# Altium PCB FEV-60_Motor_Driver.PcbDoc
Units mil, origin at the board's own origin, x right, y up, seen from the top; angles counter-clockwise.
Board outline 6850 x 5225 mil, 2 copper layers (Top Layer, Bottom Layer); 88 components, 67 nets, 333 pads, 63 vias.
Unrouted connection lines stored in the file: 85.
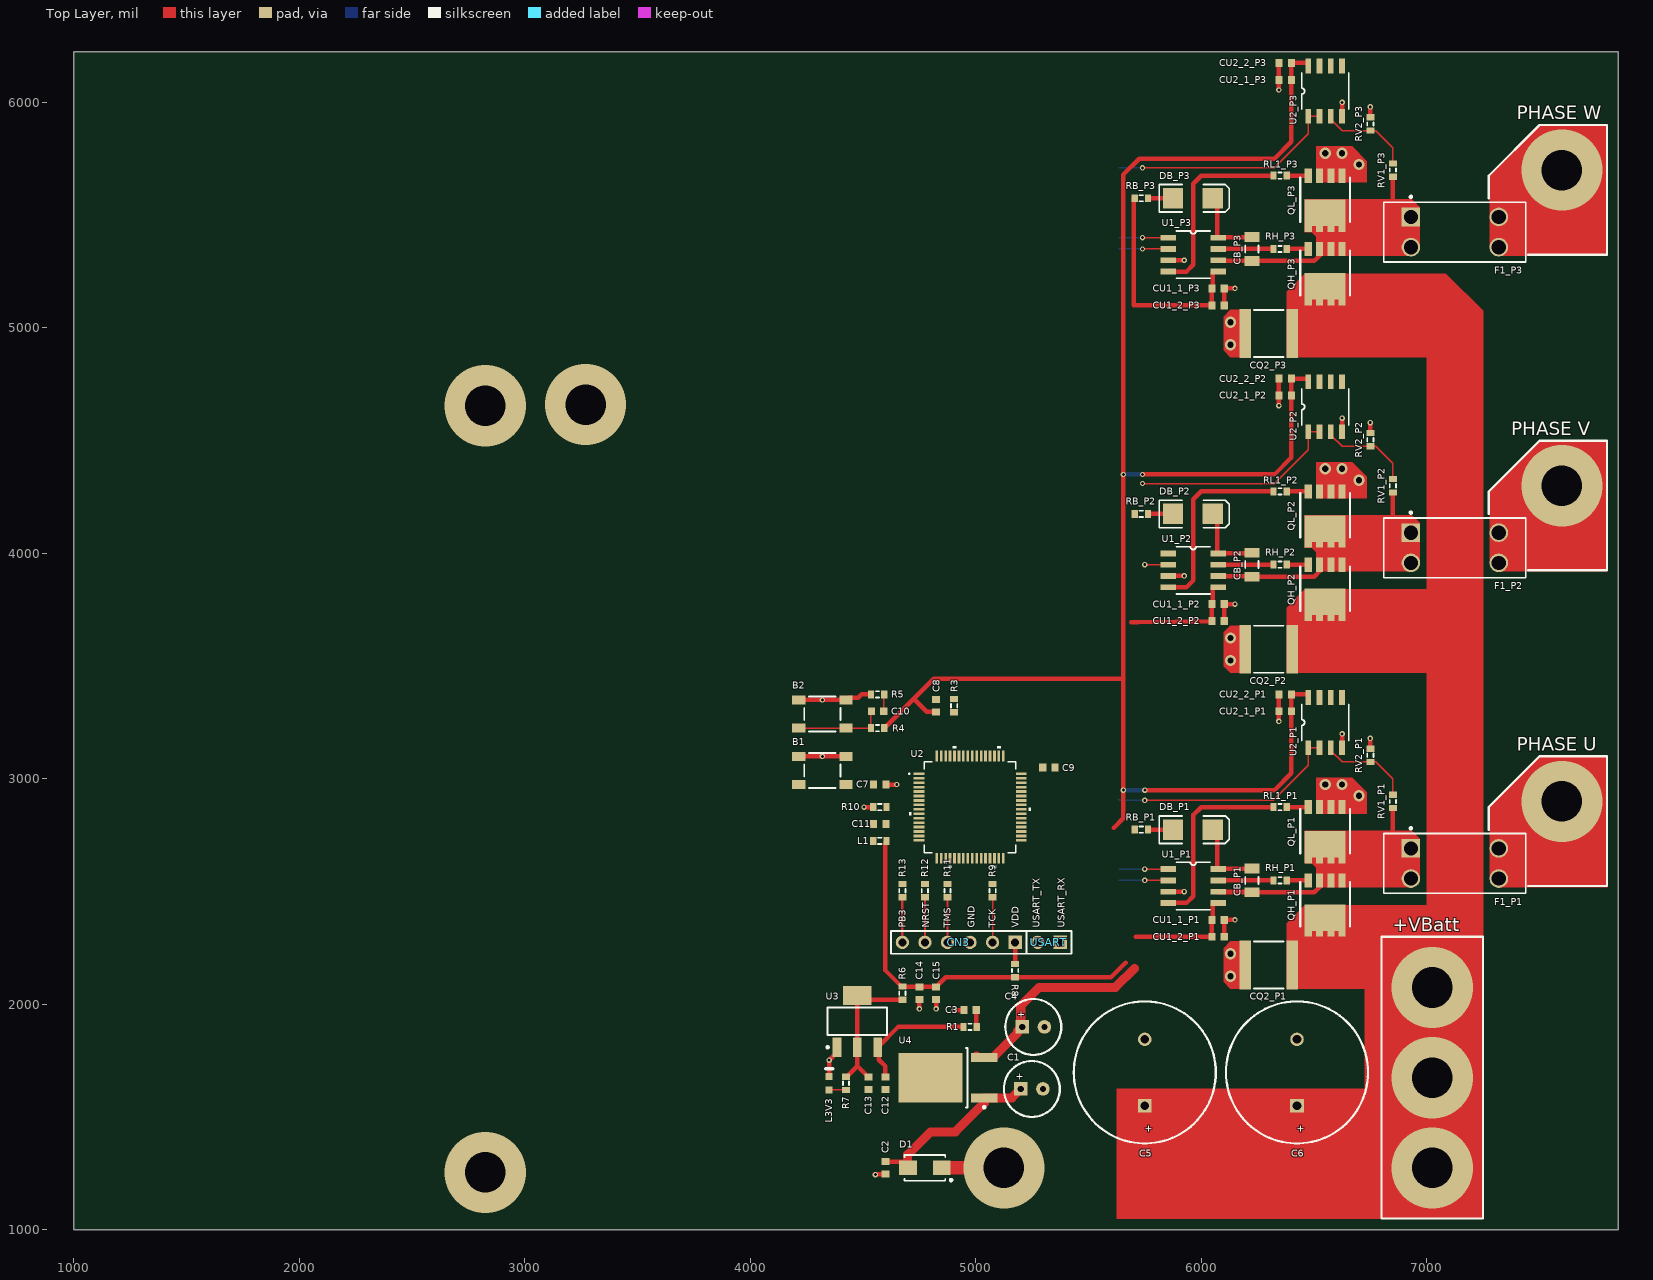
[diagram p0: Top Layer view]
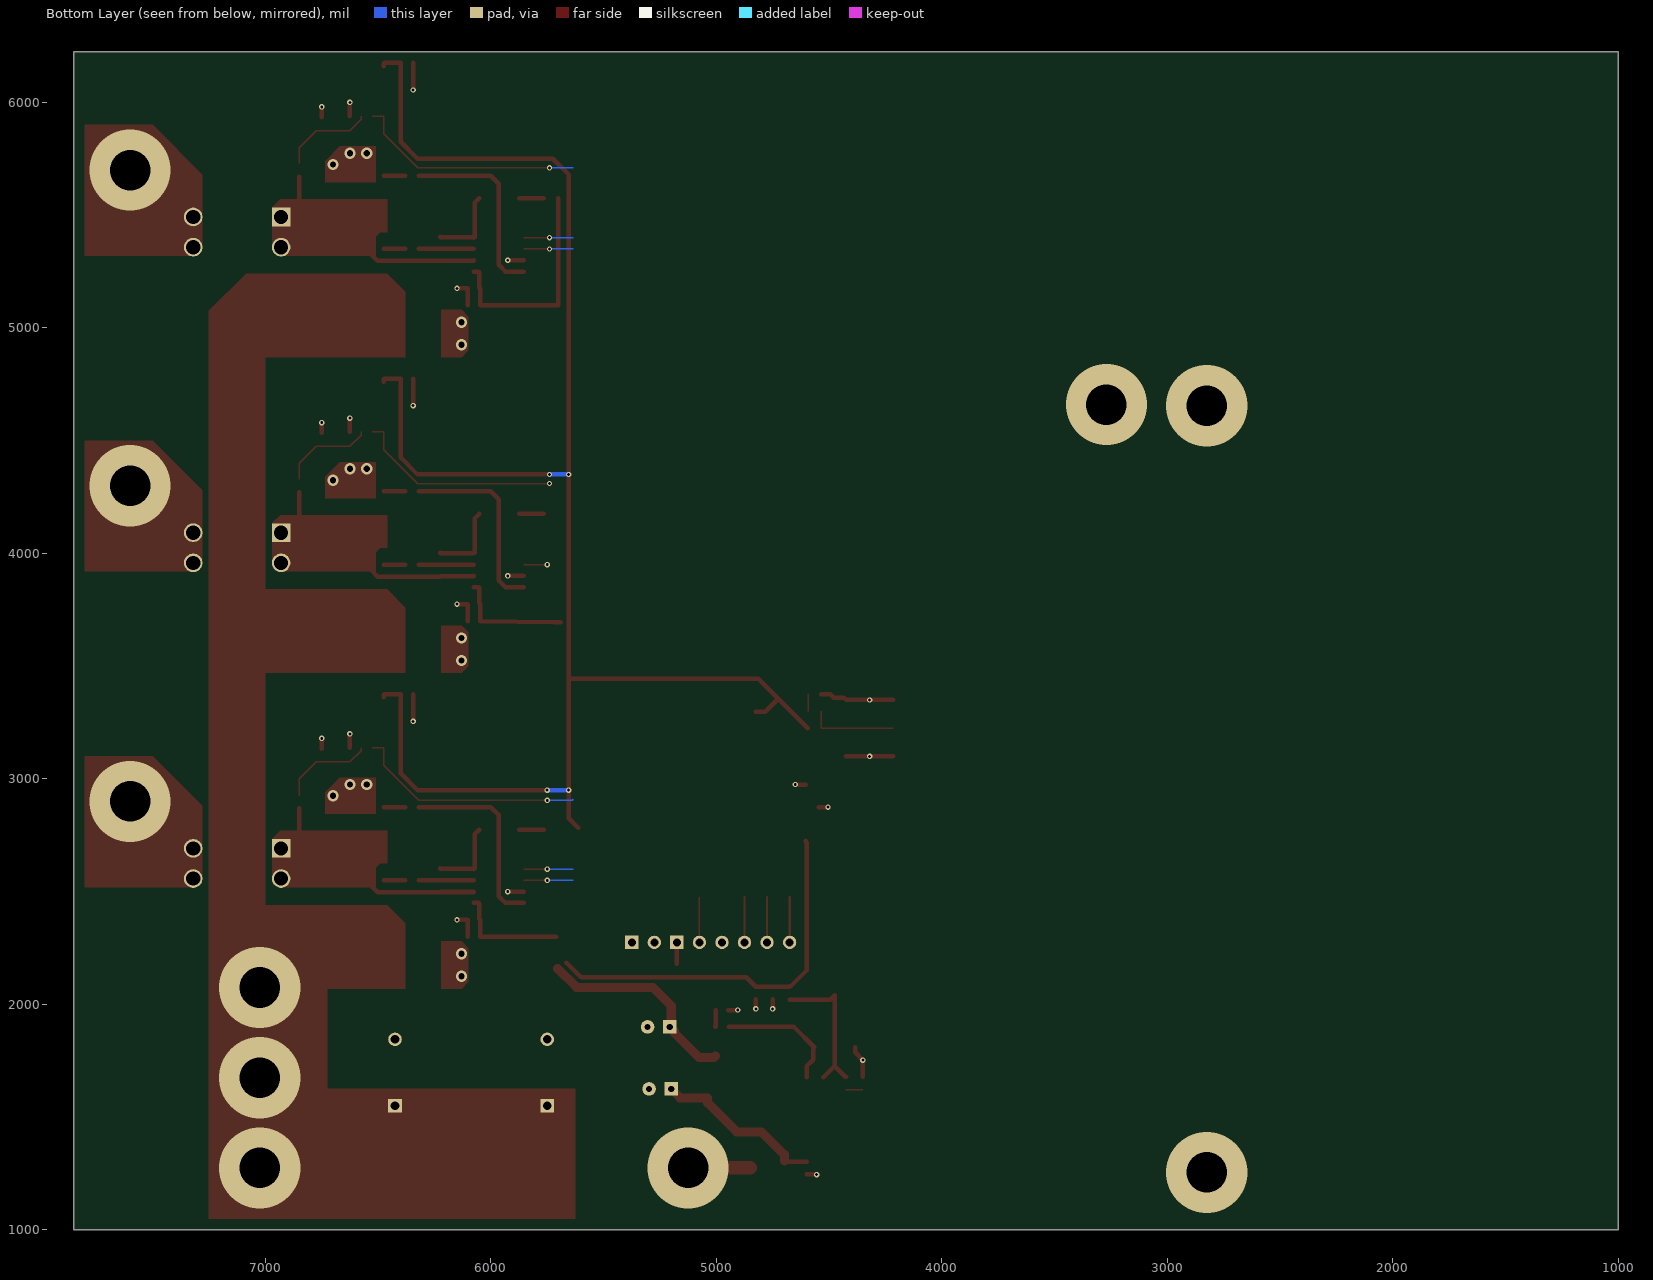
[diagram p1: Bottom Layer view, seen from below]

## Layer stack, top to bottom
Top Solder: solder mask 0.4, Solder Resist, Dk 3.5
Top Layer: signal copper 1.4
Dielectric 1: dielectric 12.6, FR-4, Dk 4.8
Bottom Layer: signal copper 1.4
Bottom Solder: solder mask 0.4, Solder Resist, Dk 3.5

## Board outline
1000,1000 7850,1000 7850,6225 1000,6225

## Design rules (kind name [scope] priority, off if disabled: settings)
Clearance Clearance_1 [InNamedPolygon('Bottom Layer-GND')] p1: gap=10 ignorepadtopadclearanceinfootprint=FALSE except(0: Arc-Hole Track-Hole SMDPad-Hole THPad-Hole Via-Hole Fill-Hole Poly-Hole Region-Hole Text-Hole; 20: Via-Fill Via-Poly Via-Region)
Clearance [All] p2: gap=10 ignorepadtopadclearanceinfootprint=FALSE except(0: Arc-Hole Track-Hole SMDPad-Hole THPad-Hole Via-Hole Fill-Hole Poly-Hole Region-Hole Text-Hole)
PlaneClearance [All] p1: clearance=100
PolygonConnect PolygonConnect_3 [All vs IsNamedPolygon('Bottom Layer-GND')] p1: connectstyle=Direct reliefconductorwidth=10 reliefentries=4 polygonreliefangle="90 Angle" airgapwidth=10
PolygonConnect PolygonConnect_2 [All vs IsNamedPolygon('Bottom Layer-GND')] p2: connectstyle=Relief reliefconductorwidth=25 reliefentries=4 polygonreliefangle="90 Angle" airgapwidth=10
PolygonConnect [All] p3: connectstyle=Relief reliefconductorwidth=10 reliefentries=4 polygonreliefangle="90 Angle" airgapwidth=10
RoutingVias [All] p1: holewidth=13 width=24 viastyle="Through Hole" minholewidth=13 minwidth=24 maxholewidth=28 maxwidth=50
SilkToSilkClearance [All] p1: silktosilkclearance=3
SilkToSolderMaskClearance [IsPad] p1: minsilkscreentomaskgap=5 clearancetoexposedcopper=TRUE
SolderMaskExpansion [All] p1: expansion=4
Width [All] p1: maxlimit=100 minlimit=6 preferedwidth=6
27 further rules are at their usual default settings.

## Classes and differential pairs
net class D1_Nets: 24V NetC1_1
net class C4_Nets: 12V GND
net class C3_Nets: 12V GND
net class C2_Nets: GND NetC1_1
net class C1_Nets: GND NetC1_1
net class U4_Nets: 12V GND NetC1_1
net class R1_Nets: 12V NetC12_2
net class L3V3_Nets: GND NetL3V3_1
net class RV2_P3_Nets: GND NetRV1_P3_1
net class RV2_P2_Nets: GND NetRV1_P2_1
net class RV2_P1_Nets: GND NetRV1_P1_1
net class RV1_P3_Nets: NetCB_P3_1 NetRV1_P3_1
net class RV1_P2_Nets: NetCB_P2_1 NetRV1_P2_1
net class RV1_P1_Nets: NetCB_P1_1 NetRV1_P1_1
net class RL1_P3_Nets: LO_P3 NetQL_P3_2
net class RL1_P2_Nets: LO_P2 NetQL_P2_2
net class RL1_P1_Nets: LO_P1 NetQL_P1_2
net class RH_P3_Nets: HO_P3 NetQH_P3_2
net class RH_P2_Nets: HO_P2 NetQH_P2_2
net class RH_P1_Nets: HO_P1 NetQH_P1_2
net class RB_P3_Nets: 12V NetDB_P3_1
net class RB_P2_Nets: 12V NetDB_P2_1
net class RB_P1_Nets: 12V NetDB_P1_1
net class QL_P3_Nets: GND NetCB_P3_1 NetQL_P3_2
net class QL_P2_Nets: GND NetCB_P2_1 NetQL_P2_2
net class QL_P1_Nets: GND NetCB_P1_1 NetQL_P1_2
net class QH_P3_Nets: 120V NetCB_P3_1 NetQH_P3_2
net class QH_P2_Nets: 120V NetCB_P2_1 NetQH_P2_2
net class QH_P1_Nets: 120V NetCB_P1_1 NetQH_P1_2
net class DB_P3_Nets: NetCB_P3_2 NetDB_P3_1
net class DB_P2_Nets: NetCB_P2_2 NetDB_P2_1
net class DB_P1_Nets: NetCB_P1_2 NetDB_P1_1
net class CU2_2_P3_Nets: GND VDD
net class CU2_1_P3_Nets: GND VDD
net class CU2_1_P2_Nets: GND VDD
net class CU2_1_P1_Nets: GND VDD
net class CU1_2_P3_Nets: 12V GND
net class CU1_2_P2_Nets: 12V GND
net class CU1_2_P1_Nets: 12V GND
net class CU1_1_P2_Nets: 12V GND
net class CU1_1_P1_Nets: 12V GND
net class CQ2_P3_Nets: 120V GND
net class CQ2_P2_Nets: 120V GND
net class C5_Nets: +120 GND
net class C6_Nets: +120 GND
net class CB_P3_Nets: NetCB_P3_1 NetCB_P3_2
net class CB_P2_Nets: NetCB_P2_1 NetCB_P2_2
net class CB_P1_Nets: NetCB_P1_1 NetCB_P1_2
net class V_SENSE[3..1]: V_SENSE1 V_SENSE2 V_SENSE3
net class U3_Nets: +3V3 GND NetC12_2
net class U2_P3_Nets: GND NetRV1_P3_1 V_SENSE3 VDD
net class U2_P2_Nets: GND NetRV1_P2_1 V_SENSE2 VDD
net class U2_P1_Nets: GND NetRV1_P1_1 V_SENSE1 VDD
net class R13_Nets: NetCN3_6 PB3
net class R12_Nets: NetCN3_5 NRST
net class R11_Nets: NetCN3_4 TMS
net class R10_Nets: AGND GND
net class R9_Nets: NetCN3_2 TCK
net class R8_Nets: NetCN3_1 VDD
net class R7_Nets: +3V3 NetL3V3_1
net class R6_Nets: +3V3 VDD
net class R5_Nets: GND NetC10_1
net class R4_Nets: NetB2_1 VDD
net class R3_Nets: BOOT0 GND
net class L1_Nets: AVDD VDD
net class F1_P3_Nets: NetCB_P3_1 NetF1_P3_3
net class F1_P2_Nets: NetCB_P2_1 NetF1_P2_3
net class F1_P1_Nets: NetCB_P1_1 NetF1_P1_3
net class CN3_Nets: GND NetCN3_1 NetCN3_2 NetCN3_4 NetCN3_5 NetCN3_6
net class C15_Nets: GND VDD
net class C14_Nets: GND VDD
net class C13_Nets: +3V3 GND
net class C12_Nets: GND NetC12_2
net class C11_Nets: AGND AVDD
net class C10_Nets: NetB2_1 NetC10_1
net class C9_Nets: GND PF6
net class C8_Nets: GND VDD
net class C7_Nets: GND NRST
net class CU2_2_P2_Nets: GND VDD
net class CU2_2_P1_Nets: GND VDD
net class B2_Nets: GND NetB2_1
net class B1_Nets: GND NRST
component class U_FEV-60_Motor_Driver_Mcu: B1 B2 C1 C2 C3 C4 C5 C6 C7 C8 C9 C10 C11 C12 C13 C14 C15 CN3 D1 L1 L3V3 R1 R3 R4 R5 R6 R7 R8 R9 R10 R11 R12 R13 U2 U3 U4 USART
net class LIN[3..1]: LIN1 LIN2 LIN3
net class HIN[3..1]: HIN1 HIN2 HIN3
net class U2_Nets: AGND AVDD BOOT0 GND HALL1 HALL2 HALL3 HIN1 HIN2 HIN3 LIN1 LIN2 LIN3 NetB2_1 NetCN2_1 NetCN2_2 NetCN2_6 NetCN2_7 NetCN2_8 NetCN2_9 NetCN2_10 NetCN2_12 NetCN2_14 NetCN2_15 NetCN2_17 NetCN2_18 NetCN2_22 NetCN2_24 NetCN2_25 NetCN2_26 NetCN2_27 NetCN2_29 NetCN2_31 NetCN2_32 NetCN2_34 NetCN2_36 NetCN2_38 NRST PB3 PF6 TCK THROTTLE TMS USART_RX USART_TX V_SENSE1 V_SENSE2 V_SENSE3 VDD
net class CN1_Nets: NetCN1_1 NetCN1_2 NetCN1_3 NetCN1_4 NetCN1_5 NetCN1_6 NetCN1_7 NetCN1_8 NetCN1_9 NetCN1_10 NetCN1_11 NetCN1_13 NetCN1_14 NetCN1_15 NetCN1_17 NetCN1_18 NetCN1_21 NetCN1_23 NetCN1_25 NetCN1_27 NetCN1_29 NetCN1_31 NetCN1_33 NetCN1_35 NetCN1_36 NetCN1_37 NetCN1_38 USART_RX USART_TX
net class U1_P3_Nets: 12V GND HIN3 HO_P3 LIN3 LO_P3 NetCB_P3_1 NetCB_P3_2
net class U1_P2_Nets: 12V GND HIN2 HO_P2 LIN2 LO_P2 NetCB_P2_1 NetCB_P2_2
net class U1_P1_Nets: 12V GND HIN1 HO_P1 LIN1 LO_P1 NetCB_P1_1 NetCB_P1_2
net class CQ2_P1_Nets: 120V GND
net class CU1_1_P3_Nets: 12V GND
component class P3: CB_P3 CQ2_P3 CU1_1_P3 CU1_2_P3 CU2_1_P3 CU2_2_P3 DB_P3 F1_P3 QH_P3 QL_P3 RB_P3 RH_P3 RL1_P3 RV1_P3 RV2_P3 U1_P3 U2_P3
component class P2: CB_P2 CQ2_P2 CU1_1_P2 CU1_2_P2 CU2_1_P2 CU2_2_P2 DB_P2 F1_P2 QH_P2 QL_P2 RB_P2 RH_P2 RL1_P2 RV1_P2 RV2_P2 U1_P2 U2_P2
component class P1: CB_P1 CQ2_P1 CU1_1_P1 CU1_2_P1 CU2_1_P1 CU2_2_P1 DB_P1 F1_P1 QH_P1 QL_P1 RB_P1 RH_P1 RL1_P1 RV1_P1 RV2_P1 U1_P1 U2_P1
channel class FEV-60_Motor_Driver_Phase1: PHASE1 PHASE2 PHASE3

## Components (designator, comment, footprint, x,y, rotation, side; value= is the part's Value field where it differs from the comment)
B1 "Button" "Button - duplicate" 4215,3100 r0 top
B2 "Button" "Button - duplicate" 4425,3225 r180 top
C1 "UVY1V101MED1TD" UVY1V101MED1TD 5218.43,1625 r0 top value=100uF
C2 "Cap Semi" 1608[0603] 4600,1275 r90 top value=1uF
C3 "Cap Semi" 1608[0603] 4975,1975 r0 top value=10uF
C4 "UVY1V101MED1TD" UVY1V101MED1TD 5225,1900 r0 top value=100uF
C5 "UCS2D151MHD1TN" UCS2D151MHD1TN 5920,1700 r90 top value=100pF
C6 "UCS2D151MHD1TN" UCS2D151MHD1TN 6595,1700 r90 top value=100pF
C7 "Cap Semi" 1608[0603] 4575,2975 r180 top value=100nF
C8 "Cap Semi" 1608[0603] 4825,3325 r270 top value=22uF
C9 "Cap Semi" 1608[0603] 5325,3050 r180 top value=2.2uF
C10 "Cap Semi" 1608[0603] 4565,3300 r180 top value=100nF
C11 "Cap Semi" 1608[0603] 4575,2800 r180 top value=10uF
C12 "Cap Semi" 1608[0603] 4600,1650 r90 top value=10uF
C13 "Cap Semi" 1608[0603] 4525,1650 r90 top value=10uF
C14 "Cap Semi" 1608[0603] 4750,2050 r90 top value=22uF
C15 "Cap Semi" 1608[0603] 4825,2050 r90 top value=22uF
CB_P1 "Cap Semi" C1206 6225,2550 r90 top value=10uF (schematic designator CB)
CB_P2 "Cap Semi" C1206 6225,3950 r90 top value=10uF (schematic designator CB)
CB_P3 "Cap Semi" C1206 6225,5350 r90 top value=10uF (schematic designator CB)
CN3 "Header 6X1" HDR1X6 5175,2275 r180 top
CQ2_P1 "1uF" TDK-C5750-2_M 6300,2175 r180 top (schematic designator CQ2)
CQ2_P2 "1uF" TDK-C5750-2_M 6300,3575 r180 top (schematic designator CQ2)
CQ2_P3 "1uF" TDK-C5750-2_M 6300,4975 r180 top (schematic designator CQ2)
CU1_1_P1 "Cap Semi" 1608[0603] 6075,2375 r0 top value=10uF (schematic designator CU1_1)
CU1_1_P2 "Cap Semi" 1608[0603] 6075,3775 r0 top value=10uF (schematic designator CU1_1)
CU1_1_P3 "Cap Semi" 1608[0603] 6075,5175 r0 top value=10uF (schematic designator CU1_1)
CU1_2_P1 "Cap Semi" 1608[0603] 6075,2300 r0 top value=10uF (schematic designator CU1_2)
CU1_2_P2 "Cap Semi" 1608[0603] 6075,3700 r0 top value=10uF (schematic designator CU1_2)
CU1_2_P3 "Cap Semi" 1608[0603] 6075,5100 r0 top value=10uF (schematic designator CU1_2)
CU2_1_P1 "Cap Semi" 1608[0603] 6372.44,3300 r180 top value=10uF (schematic designator CU2_1)
CU2_1_P2 "Cap Semi" 1608[0603] 6372.44,4700 r180 top value=10uF (schematic designator CU2_1)
CU2_1_P3 "Cap Semi" 1608[0603] 6372.44,6100 r180 top value=10uF (schematic designator CU2_1)
CU2_2_P1 "Cap Semi" 1608[0603] 6372.44,3375 r180 top value=10uF (schematic designator CU2_2)
CU2_2_P2 "Cap Semi" 1608[0603] 6372.44,4775 r180 top value=10uF (schematic designator CU2_2)
CU2_2_P3 "Cap Semi" 1608[0603] 6372.44,6175 r180 top value=10uF (schematic designator CU2_2)
D1 "STPS2L30A" STPS2L30A 4775,1275 r180 top
DB_P1 "STPS2200U" SMB 5963.58,2775 r0 top (schematic designator DB)
DB_P2 "STPS2200U" SMB 5963.58,4175 r0 top (schematic designator DB)
DB_P3 "STPS2200U" SMB 5963.58,5575 r0 top (schematic designator DB)
F1_P1 "3568" KSTN-3568_V 7125,2625 r0 top (schematic designator F1)
F1_P2 "3568" KSTN-3568_V 7125,4025 r0 top (schematic designator F1)
F1_P3 "3568" KSTN-3568_V 7125,5425 r0 top (schematic designator F1)
L1 "Ferrite" J1-0603 4575,2725 r180 top
L3V3 "HSMS-C190" AVAG-HSMX-C190_V 4350,1650 r90 top
QH_P1 "TPH2900ENH" TPH2900ENH 6625,2555 r270 top (schematic designator QH)
QH_P2 "TPH2900ENH" TPH2900ENH 6625,3955 r270 top (schematic designator QH)
QH_P3 "TPH2900ENH" TPH2900ENH 6625,5355 r270 top (schematic designator QH)
QL_P1 "TPH2900ENH" TPH2900ENH 6625,2880 r270 top (schematic designator QL)
QL_P2 "TPH2900ENH" TPH2900ENH 6625,4280 r270 top (schematic designator QL)
QL_P3 "TPH2900ENH" TPH2900ENH 6625,5680 r270 top (schematic designator QL)
R1 "Res3" J1-0603 4975,1900 r0 top value=0
R3 "Res3" J1-0603 4905,3325 r270 top value=10K
R4 "Res3" J1-0603 4565,3225 r0 top value=4.7K
R5 "Res3" J1-0603 4565,3375 r0 top value=100
R6 "Res3" J1-0603 4675,2050 r270 top value=0
R7 "Res3" J1-0603 4425,1650 r90 top value=1K
R8 "Res3" J1-0603 5175,2150 r270 top value=0
R9 "Res3" J1-0603 5075,2504.53 r90 top value=22
R10 "Res3" J1-0603 4575,2875 r0 top value=0
R11 "Res3" J1-0603 4875,2504.53 r90 top value=22
R12 "Res3" J1-0603 4775,2504.53 r90 top value=22
R13 "Res3" J1-0603 4675,2504.53 r90 top value=22
RB_P1 "Res3" J1-0603 5735,2775 r0 top value=5 (schematic designator RB)
RB_P2 "Res3" J1-0603 5735,4175 r0 top value=5 (schematic designator RB)
RB_P3 "Res3" J1-0603 5735,5575 r0 top value=5 (schematic designator RB)
RH_P1 "Res3" J1-0603 6350,2550 r0 top value=5 (schematic designator RH)
RH_P2 "Res3" J1-0603 6350,3950 r0 top value=5 (schematic designator RH)
RH_P3 "Res3" J1-0603 6350,5350 r0 top value=5 (schematic designator RH)
RL1_P1 "Res3" J1-0603 6350,2875 r0 top value=5 (schematic designator RL1)
RL1_P2 "Res3" J1-0603 6350,4275 r0 top value=5 (schematic designator RL1)
RL1_P3 "Res3" J1-0603 6350,5675 r0 top value=5 (schematic designator RL1)
RV1_P1 "Res3" J1-0603 6850,2900 r270 top value=1Meg (schematic designator RV1)
RV1_P2 "Res3" J1-0603 6850,4300 r270 top value=1Meg (schematic designator RV1)
RV1_P3 "Res3" J1-0603 6850,5700 r270 top value=1Meg (schematic designator RV1)
RV2_P1 "Res3" J1-0603 6750,3104.53 r270 top value=22K (schematic designator RV2)
RV2_P2 "Res3" J1-0603 6750,4504.53 r270 top value=22K (schematic designator RV2)
RV2_P3 "Res3" J1-0603 6750,5904.53 r270 top value=22K (schematic designator RV2)
U1_P1 "FAN7191-F085" FAN7191-F085 5854.53,2600 r0 top (schematic designator U1)
U1_P2 "FAN7191-F085" FAN7191-F085 5854.53,4000 r0 top (schematic designator U1)
U1_P3 "FAN7191-F085" FAN7191-F085 5854.53,5400 r0 top (schematic designator U1)
U2 "MCU_LQFP64" "STM32F030R8 - duplicate" 4975,2875 r0 top
U2_P1 "TLV272IDR" D0008A_M 6550,3250 r90 top (schematic designator U2)
U2_P2 "TLV272IDR" D0008A_M 6550,4650 r90 top (schematic designator U2)
U2_P3 "TLV272IDR" D0008A_M 6550,6050 r90 top (schematic designator U2)
U3 "LD1117S33TR" "LD1117S33TR - duplicate" 4475,1925 r90 top
U4 "UA78M12CKVURG3" UA78M12CKVURG3 4876.77,1675 r180 top value=Value
USART "Header 2" HDR1X2 5375,2275 r180 top (schematic designator CN1)

## Footprints (in the part's own frame and the unit in brackets; to place one, negate y for a bottom-side part, rotate by r counter-clockwise, add the part's x,y. Pads: shape width x height; smd on the part's side, far side on the other; paste and mask are expansions set on the pad)
1608[0603] [mm] "Chip Capacitor, Body 1.6x0.8mm, IPC High Density"
  rect 0.8x0.9 smd: 1(-0.7,0) 2(0.7,0)
  body extent -0.87,-0.48 0.87,0.48, height 1.3
AVAG-HSMX-C190_V [mm] "SMD, 2-Leads, Body 1.6x0.8mm, Height 0.9mm"
  rect 0.8x0.8 smd: 1(-0.75,0) 2(0.75,0)
  silkscreen extent 1.65,-0.4 1.65,0.4, body extent -0.8,-0.4 0.8,0.4, height 0.9
"Button - duplicate" [mm]
  rect 1.5x1 smd: 1(0,0) 2(0,-3.175) 3(5.334,-3.175) 4(5.334,0)
  silkscreen extent 0.64,-3.56 4.7,0.38
C1206 [mm] "Chip Capacitor, Body 3.2x1.6mm, IPC High Density"
  rect 1.1x1.7 smd: 1(-1.35,0) 2(1.35,0)
  silkscreen extent -0.4,-0.75 0.4,0.75, body extent -1.7,-0.9 1.7,0.9, height 1.3
D0008A_M [mm] "SOIC, 8-Leads, Body 5x4mm, Pitch 1.27mm, IPC Low Density"
  rect 1.65x0.65 smd: 1(-2.825,1.905) 2(-2.825,0.635) 3(-2.825,-0.635) 4(-2.825,-1.905) 5(2.825,-1.905) 6(2.825,-0.635) 7(2.825,0.635) 8(2.825,1.905)
  silkscreen extent -2.03,-2.67 2.03,2.63, body extent -3,-2.45 3,2.45, height 1.63
FAN7191-F085 [mm]
  rect 1.75x0.65 smd: 1(0,0) 2(0,-1.27) 3(0,-2.54) 4(0,-3.81) 5(5.6,-3.81) 6(5.6,-2.54) 7(5.6,-1.27) 8(5.6,0)
  silkscreen extent 0.89,-4.57 4.7,0.76
HDR1X2 [mm] "Connector; Header; 2 Position"
  rect 1.5x1.5 hole 0.9: 1(0,0)
  round 1.5 hole 0.9: 2(2.54,0)
  silkscreen extent -1.27,-1.27 3.81,1.27
HDR1X6 [mm] "Connector; Header; 6 Position"
  rect 1.5x1.5 hole 0.9: 1(0,0)
  round 1.5 hole 0.9: 2(2.54,0) 3(5.08,0) 4(7.62,0) 5(10.16,0) 6(12.7,0)
  silkscreen extent -1.27,-1.27 13.97,1.27
J1-0603 [mm] "Chip Resistor, Body 1.6x0.8mm, IPC High Density"
  rect 0.7x0.9 smd: 1(-0.75,0) 2(0.75,0)
  silkscreen extent -0.2,-0.35 0.2,0.35, body extent -0.85,-0.48 0.85,0.48, height 0.9
KSTN-3568_V [mm] "THD, 4-Leads, Body 16x6.73mm, Pitch 9.9mm"
  rect 2.1x2.1 hole 1.6: 1(-4.95,1.7)
  round 2.1 hole 1.6: 2(-4.95,-1.7) 3(4.95,1.7) 4(4.95,-1.7)
  silkscreen extent -8,-3.36 8,4.09, body extent -8,-3.37 8,3.37, height 7.44
"LD1117S33TR - duplicate" [mm] "SOT223, LDO 3.3V Converter"
  rect 2.15x1 smd: 1(-2.925,2.3) 2(-2.925,0) 3(-2.925,-2.3)
  rect 2.15x3.25 smd: 4(2.925,0)
  silkscreen extent -3.05,-3.35 1.55,3.47, body extent -3.5,-3.35 3.5,3.35, height 1.8
SMB [mm] "DO-214-AA/SMB; 2 C-Bend Leads; Body 5.3 x 3.6 mm, inc. leads (LxW)"
  rect 2.3x2.3 smd: 1(-2.25,0) 2(2.25,0)
  silkscreen extent -3.8,-1.55 4.1,1.55
"STM32F030R8 - duplicate" [mil]
  rect 47x12 smd: 1(-226.38,147.64) 2(-226.38,127.95) 3(-226.38,108.27) 4(-226.38,88.58) 5(-226.38,68.9) 6(-226.38,49.21) 7(-226.38,29.53) 8(-226.38,9.84) 9(-226.38,-9.84) 10(-226.38,-29.53) 11(-226.38,-49.21) 12(-226.38,-68.9) 13(-226.38,-88.58) 14(-226.38,-108.27) 15(-226.38,-127.95) 16(-226.38,-147.64) 33(226.38,-147.64) 34(226.38,-127.95) 35(226.38,-108.27) 36(226.38,-88.58) 37(226.38,-68.9) 38(226.38,-49.21) 39(226.38,-29.53) 40(226.38,-9.84) 41(226.38,9.84) 42(226.38,29.53) 43(226.38,49.21) 44(226.38,68.9) 45(226.38,88.58) 46(226.38,108.27) 47(226.38,127.95) 48(226.38,147.64)
  rect 12x47 smd: 17(-147.64,-226.38) 18(-127.95,-226.38) 19(-108.27,-226.38) 20(-88.58,-226.38) 21(-68.9,-226.38) 22(-49.21,-226.38) 23(-29.53,-226.38) 24(-9.84,-226.38) 25(9.84,-226.38) 26(29.53,-226.38) 27(49.21,-226.38) 28(68.9,-226.38) 29(88.58,-226.38) 30(108.27,-226.38) 31(127.95,-226.38) 32(147.64,-226.38) 49(147.64,226.38) 50(127.95,226.38) 51(108.27,226.38) 52(88.58,226.38) 53(68.9,226.38) 54(49.21,226.38) 55(29.53,226.38) 56(9.84,226.38) 57(-9.84,226.38) 58(-29.53,226.38) 59(-49.21,226.38) 60(-68.9,226.38) 61(-88.58,226.38) 62(-108.27,226.38) 63(-127.95,226.38) 64(-147.64,226.38)
  silkscreen extent -273,-270 270,270, body extent -236,-236 236,236, height 63
STPS2L30A [mm] "SODFL, Shottkey Diode"
  rect 2x1.65 smd: 1(-1.9,0) 2(1.9,0)
  silkscreen extent -3.08,-1.45 2.3,1.5, body extent -2.54,-1.45 2.54,1.45, height 2.45
TDK-C5750-2_M [mm] "SMD, 2-Leads, Body 6.1x5.4mm, IPC Low Density"
  rect 1.27x5.5 smd: 1(-2.644,0) 2(2.644,0)
  silkscreen extent -1.67,-2.65 1.67,2.65, body extent -3.05,-2.7 3.05,2.7, height 2.5
TPH2900ENH [mm]
  rect 3x4.61 smd: 1(4.318,-1.905)
  rect 1.6x0.8 smd: 1(5.673,-1.27) 1(5.673,0) 1(5.673,-3.81) 1(5.673,-2.54) 2(0.127,-3.81) 3(0.127,0) 3(0.127,-1.27) 3(0.127,-2.54)
  silkscreen extent 0.33,-4.7 5.33,0.89
UA78M12CKVURG3 [mm] "12V LDO, 3-Pads, Body 6.21x6.71mm (max), IPC Medium Density"
  rect 3x1 smd: 1(-4.1,2.28) 3(-4.1,-2.28)
  rect 7.2x5.55 smd: 2(1.95,0)
  silkscreen extent -4.23,-3.35 -2.05,3.45, body extent -4.53,-3.35 5.37,3.35, height 2.52
UCS2D151MHD1TN [mil] "Radial Cap 50% Protection"
  rect 60x60 hole 38: 1(-150,170)
  round 60 hole 38: 2(145,170)
  silkscreen extent -316,-145 313,485
UVY1V101MED1TD [mil] "Radial Cap from Nichicon"
  rect 60x60 hole 28: 1(-18.43,0)
  round 60 hole 28: 2(80,0)
  silkscreen extent -93,-124 155,124

## Part data
C1 C4 C5 C6: "Polarized Capacitor (Axial)", LatestRevisionDate=17-Jul-2002, LatestRevisionNote="Re-released for DXP Platform.", PackageDescription="Polarized Capacitor; 2 Leads", PackageReference=POLAR0.8, Published=8-Jun-2000, Publisher="Altium Limited"
C2 C3 C7 C8 C9 C10 C11 C12 C13 C14 C15 CU1_1_P1 CU1_1_P2 CU1_1_P3 CU1_2_P1 CU1_2_P2 CU1_2_P3 CU2_1_P1 CU2_1_P2 CU2_1_P3 CU2_2_P1 CU2_2_P2 CU2_2_P3: "Capacitor (Semiconductor SIM Model)", LatestRevisionDate=29-May-2009, LatestRevisionNote="IPC-7351 Footprint Added.", PackageDescription="Chip Capacitor", PackageReference=C1206, Published=8-Jun-2000, Publisher="Altium Limited"
CB_P1 CB_P2 CB_P3: "Capacitor (Semiconductor SIM Model) at least 10-20uF", LatestRevisionDate=29-May-2009, LatestRevisionNote="IPC-7351 Footprint Added.", PackageDescription="Chip Capacitor", PackageReference=C1206, Published=8-Jun-2000, Publisher="Altium Limited"
CN3: "Header, 6-Pin, Single row", LatestRevisionDate=17-Jul-2002, LatestRevisionNote="Re-released for DXP Platform.", Publisher="Altium Limited"
CQ2_P1 CQ2_P2 CQ2_P3: library part C5750X7R2E105K230KA, "Chip Capacitor, 1 uF, +/- 20%, 250 V, -55 to 125 degC, 2220 (5750 Metric), RoHS, Tape and Reel", Capacitance=10µF, Manufacturer=TDK, Operating Temperature=-55°C~125°C, Package / Case=2220(5750Metric), Package Description="SMD, 2-Leads, Body 6.1 x 5.4 mm", Package Reference=C5750-2, PCN Part Number=MLCCPartNumberChange30/Nov/2012, Ratings=-, Standard Package=1, Temperature Coefficient=X7S, Tolerance=±20%, Voltage - Rated=100V, Applications=GeneralPurpose, Catalog Drawings=CSERIES_2220_2.5, Category=Capacitors, Datasheet URL=https://datasheet.ciiva.com/24216/c5750x7s2a106m230kb-265716-24216594.pdf, Datasheet Version=09/2013, Family=CeramicCapacitors, Featured Product=Compact,High-CapacitanceMultilayerCeramicChipCapacitorsMidVoltageX7S-100VMLCCsC-SeriesMidVoltageMLCCs, Features=-, Height - Seated (Max)=-, Kits=445-9009-KIT-ND-KITCAPCERHICAP100V-630VSMDSAMPLEKIT1008-ND-KITCAPCERMLCC100V-630V, Lead Spacing=-, Lead Style=-, Manufacturer URL=http://www.tdk.com/, Mounting Technology=SurfaceMount, Mounting Type=SurfaceMount,MLCC, Online Catalog=CSeries,MidVoltage, Other Names=445-5212-1, Packaging=CutTape(CT), Product Training Modules=SEAT,CCV,andTVCLDesignToolsCSeriesMidVoltageCapacitorsFamilyGuidetoReplacinganElectrolyticCapacitorwithanMLCC, RoHS Information=RoHSCertificate-MLCC, Series=C, Size / Dimension="0.224\"Lx0.197\"W(5.70mmx5.00mm)", Thickness (Max)="0.098\"(2.50mm)"
D1: Manuf_1=STM, Manuf_Part_1=BAT60JFILM, Distrib=ST, ECCN_US/EU=EAR99/NEC, Order=BAT60JFILM, Provided=ST, Revision="July-2002: Re-released for DXP Platform."
DB_P1 DB_P2 DB_P3: library part "D Schottky", "Schottky Diode", Code_JEDEC=DO-214-AA, LatestRevisionDate=17-Jul-2002, LatestRevisionNote="Re-released for DXP Platform.", PackageDescription="DO-214-AA/SMB; 2 C-Bend Leads; Body 5.3 x 3.6 mm, inc. leads (LxW)", PackageReference=SMB, Published=8-Jun-2000, Publisher="Altium Limited"
F1_P1 F1_P2 F1_P3: library part CMP-2000-05464-1, "Fuse Holder, 20 A, 500 V, -50 to 145 degC, 4-Pin THD, RoHS", Manufacturer=Keystone, Package Description="4-Pin Through Hole Device, Body 16 x 6.73 mm, Pitch 9.9 mm", Datasheet URL=https://datasheet.ciiva.com/16294/m60-2p40-16294706.pdf, Datasheet Version=04/2013, Manufacturer URL=http://www.keyelco.com/, Mounting Technology=ThroughHole, Package Reference=3568
L1: library part Res3, "Resistor", LatestRevisionDate=29-May-2009, LatestRevisionNote="IPC-7351 Footprint Added.", PackageDescription="Chip Resistor", PackageReference=J1-0603, Published=8-Jun-2000, Publisher="Altium Limited"
L3V3: library part CMP-2000-06427-1, "LED Uni-Color Red, 52 mW, 20 mA, -40 to 85 degC, 2-Pin SMD, RoHS, Tape and Reel", Emitting Color=Red, Forward Current=25mA, Forward Voltage=2.6V, Manufacturer=Avago, Operating Temperature Classification=Industrial, Operating Temp Range=-40Cto85C, Package Description="2-Pin Surface Mount Device, Body 1.6 x 0.8 mm, Height 0.9 mm", Package Reference=HSMX-C190, Package Type=ChipLed, Power Dissipation=52W, Reverse Voltage=5V, Test Current (It)=20mA, Chip Material=GaP, Datasheet URL=http://docs.avagotech.com/docs/AV02-0551EN, Datasheet Version=03/2012, DELETED=Compliant, Dominant Wave Length=626nm, High Brightness=No, Lens Dimensions=1x0.8x0.5mm, Lens Type=ColorlessDiffused, Luminous Intensity=10mcd, Lum Intensity=10mcd, Main Category=ChipLED, Manufacturer URL=http://www.avagotech.com/, Mounting=SurfaceMount, Mounting Technology=SurfaceMount, Number of  Elements=1, Packaging=TapeandReel, Peak Wavelength=630nm, Pin Count=2, Product Depth (mm)=0.8mm, Product Height (mm)=0.8mm, Product Length (mm)=1.6mm, Rad Hardened=No, Shape Type=Rectangular, Type=Uni-Color, Viewing Angle=170deg
QH_P1 QH_P2 QH_P3 QL_P1 QL_P2 QL_P3: "N-Channel 200V 33A (Ta) 78W (Tc) Surface Mount 8-SOP Advance (5x5)", Manufacturer=Toshiba, Part Number=TPH2900ENHL1QCT-ND, ComponentLink1Description=TPH2900ENH, ComponentLink1URL=https://www.digikey.com/product-detail/en/toshiba-semiconductor-and-storage/TPH2900ENHL1Q/TPH2900ENHL1QCT-ND/5456291
R1 R3 R4 R5 R6 R7 R8 R9 R10 R11 R12 R13 RB_P1 RB_P2 RB_P3 RH_P1 RH_P2 RH_P3 RL1_P1 RL1_P2 RL1_P3 RV1_P1 RV1_P2 RV1_P3 RV2_P1 RV2_P2 RV2_P3: "Resistor", LatestRevisionDate=29-May-2009, LatestRevisionNote="IPC-7351 Footprint Added.", PackageDescription="Chip Resistor", PackageReference=J1-0603, Published=8-Jun-2000, Publisher="Altium Limited"
U1_P1 U1_P2 U1_P3: "600 V / 4.5 A, High and Low / Side Automotive Gate / Driver IC", Manufacturer="On Semiconductor", ComponentLink1Description=Datasheet, ComponentLink1URL=https://www.onsemi.com/pub/Collateral/FAN7191_F085-D.PDF, Part Number=FAN7191-F085
U2_P1 U2_P2 U2_P3: library part CMP-0272-02013-3, "550 uA/Ch, 3 MHz, Rail-to-Rail Output Operational Amplifier, 2.7 to 16 V, -40 to 125 degC, 8-pin SOIC (D8), Green (RoHS & no Sb/Br)", Manufacturer="Texas Instruments", Rating=Catalog, Total Supply Voltage(Max)(+5V is 5, +/-5V is 10)=16, Total Supply Voltage(Min)(+5V is 5, +/-5V is 10)=2.7, CMRR(Min)(dB)=58, Code_JEDEC=MS-012, ComponentLink1Description="Manufacturer URL", ComponentLink1URL=http://www.ti.com/, ComponentLink2Description=Datasheet, ComponentLink2URL=http://www.ti.com/lit/ds/symlink/tlv272.pdf, ComponentLink3Description="Package Specification", ComponentLink3URL=http://www.ti.com/litv/pdf/msoi002j, DatasheetVersion=SLOS351D, Eco-Plan="Green (RoHS & no Sb/Br)", GBW(Typ)(MHz)=2.4, IIB(Max)(pA)=60, Iq per channel(Max)(mA)=0.56, Mounting Technology="Surface Mount", Number of Channels=2, Offset Drift(Typ)(uV/C)=2, PackageDescription="8-Pin Plastic Small Outline, Body 4.9 x 3.9 mm, Pitch 1.27 mm", PackageReference=D0008A, PackageVersion="4040047-3/M, 06/2011", Packing="LARGE T&R", PartNumber=TLV272IDR, Slew Rate(Typ)(V/us)=2.1, Sub Family="Low Supply Voltage Amplifier (<=2.7V), Precision Amplifier", Vio (25C)(Max)(mV)=5
U4: "No Description Available", Manufacturer="Texas Instruments", Built_By=EMA_UL_Team, ComponentLink1Description=Digikey, ComponentLink1URL=https://www.digikey.com/product-detail/en/texas-instruments/UA78M12CKVURG3/296-19664-1-ND/1026434, Copyright="Copyright (C) 2018 Accelerated Designs. All rights reserved", Manufacturer_Part_Number=UA78M12CKVURG3, RefDes=RefDes, Type=DEV, Vendor="Texas Instruments"
USART: "Header, 2-Pin", LatestRevisionDate=17-Jul-2002, LatestRevisionNote="Re-released for DXP Platform.", Publisher="Altium Limited"

## Via types
v1: diameter 24, hole 13, Top Layer to Bottom Layer, 36 vias
v2: diameter 50, hole 28, Top Layer to Bottom Layer, 17 vias
v3: diameter 360, hole 180, Top Layer to Bottom Layer, 10 vias

## Nets (pads, with @x,y where several pads share a name; then routed paths per layer and width w, separated by ;. In a path a pad name is that pad's centre, name@x,y a point inside that pad or via, vN(x,y) a via of type N, cw(c..) or ccw(c..) an arc to the next point about the centre after c; other vN are vias at no path point)
12V: C3.2 C4.1 CU1_1_P1.1 CU1_1_P2.1 CU1_1_P3.1 CU1_2_P1.1 CU1_2_P2.1 CU1_2_P3.1 R1.2 RB_P1.1 RB_P2.1 RB_P3.1 U1_P1.5 U1_P2.5 U1_P3.5 U4.3 | length 3052.4
  Top Layer w20: C3.2 5002.56,1901.97 R1.2 ; 5690,3695 5720.72,3695 5720.43,3695.29 CU1_2_P2.1 CU1_1_P2.1 6050.55,3778.11 6050.55,3847.2 6053.35,3850 U1_P2.5 ; RB_P3.1@5700.47,5575 5700.47,5100 CU1_2_P3.1 CU1_1_P3.1 6050.55,5178.11 6050.55,5247.2 6053.35,5250 U1_P3.5 ; 5710,2300 CU1_2_P1.1 CU1_1_P1.1 6050.55,2378.11 6050.55,2447.2 6053.35,2450 U1_P1.5
  Top Layer w40: U4.3@5004.53,1770.47 5010.24,1764.76 U4.3 5077.56,1764.76 5186.57,1873.78 5186.57,1881.97 C4.1@5200,1895.39 ; C4.1@5205.59,1900.98 C4.1@5200,1895.39 ; 5705,2160 5620,2075 5281.57,2075 5200,1993.43 C4.1@5200,1895.39
24V: D1.1 | length 275.2
  Top Layer w60: D1.1 v3(5125,1275)
120V: CQ2_P1.1 CQ2_P2.1 CQ2_P3.1 QH_P1.1 QH_P2.1 QH_P3.1
+3V3: C13.2 R6.2 R7.2 U3.2 U3.4 | length 662.5
  Top Layer w20: R7.2 4428.94,1679.53 4475,1725.59 ; C13.2 4500,1702.56 4475.98,1726.57 4475,1725.59 ; R6.2 4494.69,2020.47 U3.4 U3.2 4475,1725.59
+120: C5.1 C6.1
  other v3: 7025,1275 7025,1675 7025,2075
AGND: C11.1 R10.2 U2.12
AVDD: C11.2 L1.2 U2.13
BOOT0: R3.2 U2.60
GND: B1.1 B1.4 B2.2 B2.3 C1.2 C2.1 C3.1 C4.2 C5.2 C6.2 C7.1 C8.1 C9.1 C12.1 C13.1 C14.1 C15.1 CN3.3 CQ2_P1.2 CQ2_P2.2 CQ2_P3.2 CU1_1_P1.2 CU1_1_P2.2 CU1_1_P3.2 CU1_2_P1.2 CU1_2_P2.2 CU1_2_P3.2 CU2_1_P1.2 CU2_1_P2.2 CU2_1_P3.2 CU2_2_P1.2 CU2_2_P2.2 CU2_2_P3.2 L3V3.2 QL_P1.3 QL_P2.3 QL_P3.3 R3.1 R5.1 R10.1 RV2_P1.1 RV2_P2.1 RV2_P3.1 U1_P1.3 U1_P2.3 U1_P3.3 U2.31 U2.63 U2_P1.4 U2_P2.4 U2_P3.4 U3.1 U4.2 | length 2206.7
  Top Layer w20: B1.1 v1(4320,3100) B1.4 ; B2.3 v1(4320,3350) B2.2 4434.69,3359.69 4478.6,3359.69 4493.92,3375 R5.1 ; L3V3.2 v1(4350,1752.75) 4384.45,1787.2 U3.1 ; v1(4505,2875) R10.1 ; v1(4555,1245) 4555.77,1245.77 4598.32,1245.77 C2.1 ; C7.1 v1(4650,2975) ; v1(4750,1980) C14.1 ; v1(4825,1980) C15.1 ; v1(4905,1975) C3.1 ; U1_P1.3 v1(5925,2500) ; U1_P2.3 v1(5925,3900) ; U1_P3.3 v1(5925,5300) ; CU1_2_P1.2 CU1_1_P1.2 v1(6150,2375) ; CU1_2_P2.2 CU1_1_P2.2 v1(6150,3775) ; CU1_2_P3.2 CU1_1_P3.2 v1(6150,5175) ; v1(6344.94,3255.06) CU2_1_P1.2 CU2_2_P1.2 ; v1(6344.94,4655.06) CU2_1_P2.2 CU2_2_P2.2 ; CU2_2_P3.2 CU2_1_P3.2 6344.94,6099.94 6344.94,6055.06 v1(6345,6055) ; U2_P1.4 v1(6625,3200) ; U2_P2.4 v1(6625,4600) ; U2_P3.4 v1(6625,6000) ; RV2_P1.1 v1(6750,3180) ; RV2_P2.1 v1(6750,4580) ; RV2_P3.1 v1(6750,5980)
  other v2: 6130,2125 6130,2225 6700,2925 6550,2975 6625,2975 6130,3525 6130,3625 6700,4325 6550,4375 6625,4375 6130,4925 6130,5025 6700,5725 6550,5775 6625,5775
  other v3: 2825,1255 2825,4655 3270,4660
HALL1: U2.33
HALL2: U2.34
HALL3: U2.30
HIN1: U1_P1.1 U2.41 | length 219.5
  Top Layer w6: v1(5750,2600) U1_P1.1
  Bottom Layer w6: 5635,2600 v1(5750,2600)
HIN2: U1_P2.1 U2.23
HIN3: U1_P3.1 U2.35 | length 219.5
  Top Layer w6: v1(5740,5400) U1_P3.1
  Bottom Layer w6: 5635,5400 v1(5740,5400)
HO_P1: RH_P1.1 U1_P1.7 | length 245.5
  Top Layer w20: U1_P1.7 RH_P1.1
HO_P2: RH_P2.1 U1_P2.7 | length 245.5
  Top Layer w20: U1_P2.7 RH_P2.1
HO_P3: RH_P3.1 U1_P3.7 | length 245.5
  Top Layer w20: U1_P3.7 RH_P3.1
LIN1: U1_P1.2 U2.42 | length 219.5
  Top Layer w6: v1(5750,2550) U1_P1.2
  Bottom Layer w6: 5635,2550 v1(5750,2550)
LIN2: U1_P2.2 U2.37 | length 104.5
  Top Layer w6: v1(5750,3950) U1_P2.2
LIN3: U1_P3.2 U2.36 | length 214.5
  Top Layer w6: v1@5745,5350 U1_P3.2
  Bottom Layer w6: 5635,5350 v1(5740,5350)
LO_P1: RL1_P1.1 U1_P1.4 | length 852.9
  Top Layer w20: U1_P1.4 5935,2450 5965,2480 5965,2840 6000,2875 RL1_P1.1
LO_P2: RL1_P2.1 U1_P2.4 | length 852.9
  Top Layer w20: U1_P2.4 5935,3850 5965,3880 5965,4240 6000,4275 RL1_P2.1
LO_P3: RL1_P3.1 U1_P3.4 | length 852.9
  Top Layer w20: U1_P3.4 5935,5250 5965,5280 5965,5640 6000,5675 RL1_P3.1
NetB2_1: B2.1 B2.4 C10.2 R4.1 U2.2 | length 396.3
  Top Layer w6: B2.4 B2.1 R4.1 4535.47,3298.03 C10.2
NetC1_1: C1.1 C2.2 D1.2 U4.1 | length 763
  Top Layer w20: C2.2 4695.85,1302.56 D1.2@4698.39,1305.1
  Top Layer w40: D1.2@4698.39,1305.1 4698.39,1333.39 4800,1435 4910,1435 5038.19,1563.19 U4.1 5160.24,1585.24 C1.1
NetC10_1: C10.1 R5.2 | length 75.8
  Top Layer w6: C10.1 4592.56,3373.03 R5.2
NetC12_2: C12.2 R1.1 U3.3 | length 563.8
  Top Layer w20: C12.2 4600,1725 4570.28,1754.72 4570.28,1805.12 U3.3 4655.71,1900 R1.1
NetCB_P1_1: CB_P1.1 F1_P1.1 F1_P1.2 QH_P1.3 QL_P1.1 RV1_P1.2 U1_P1.6 | length 1166.9
  Top Layer w20: U1_P1.6 6076.57,2498.43 6223.43,2498.43 CB_P1.1 6501.85,2496.85 6525,2520 6525,2550 QL_P1.1@6525,2656.65 ; QL_P1.1@6625,2656.65 6628.94,2660.59 6898.78,2660.59 F1_P1.1 ; RV1_P1.2 6850,2750 6908.07,2691.93 F1_P1.1 ; F1_P1.1@6955.12,2691.93 F1_P1.1
NetCB_P1_2: CB_P1.2 DB_P1.2 U1_P1.8 | length 335.8
  Top Layer w20: DB_P1.2 6072.2,2754.96 6072.2,2602.8 U1_P1.8 6076.57,2601.57 6223.43,2601.57 CB_P1.2
NetCB_P2_1: CB_P2.1 F1_P2.1 F1_P2.2 QH_P2.3 QL_P2.1 RV1_P2.2 U1_P2.6 | length 1187.4
  Top Layer w20: U1_P2.6 6076.57,3898.43 6223.43,3898.43 CB_P2.1 6501.85,3896.85 6525,3920 6525,3950 QL_P2.1@6525,4056.65 ; QL_P2.1@6625,4056.65 6628.94,4060.59 6898.78,4060.59 F1_P2.1 ; RV1_P2.2 6850,4115 6873.07,4091.93 F1_P2.1 ; F1_P2.1@6955.12,4091.93 F1_P2.1
NetCB_P2_2: CB_P2.2 DB_P2.2 U1_P2.8 | length 335.8
  Top Layer w20: DB_P2.2 6072.2,4154.96 6072.2,4002.8 U1_P2.8 6076.57,4001.57 6223.43,4001.57 CB_P2.2
NetCB_P3_1: CB_P3.1 F1_P3.1 F1_P3.2 QH_P3.3 QL_P3.1 RV1_P3.2 U1_P3.6 | length 1166.9
  Top Layer w20: U1_P3.6 6076.57,5298.43 6223.43,5298.43 CB_P3.1 6501.85,5296.85 6525,5320 6525,5350 QL_P3.1@6525,5456.65 ; QL_P3.1@6625,5456.65 6628.94,5460.59 6898.78,5460.59 F1_P3.1 ; RV1_P3.2 6850,5550 6908.07,5491.93 F1_P3.1 ; F1_P3.1@6955.12,5491.93 F1_P3.1
NetCB_P3_2: CB_P3.2 DB_P3.2 U1_P3.8 | length 335.8
  Top Layer w20: DB_P3.2 6072.2,5554.96 6072.2,5402.8 U1_P3.8 6076.57,5401.57 6223.43,5401.57 CB_P3.2
NetCN3_1: CN3.1 R8.1 | length 95.5
  Top Layer w20: R8.1 CN3.1
NetCN3_2: CN3.2 R9.1 | length 200
  Top Layer w6: CN3.2 R9.1
NetCN3_4: CN3.4 R11.1 | length 200
  Top Layer w10: CN3.4 R11.1
NetCN3_5: CN3.5 R12.1 | length 200
  Top Layer w10: CN3.5 R12.1
NetCN3_6: CN3.6 R13.1 | length 200
  Top Layer w10: CN3.6 R13.1
NetDB_P1_1: DB_P1.1 RB_P1.2 | length 110.5
  Top Layer w20: RB_P1.2 DB_P1.1
NetDB_P2_1: DB_P2.1 RB_P2.2 | length 110.5
  Top Layer w20: RB_P2.2 DB_P2.1
NetDB_P3_1: DB_P3.1 RB_P3.2 | length 110.5
  Top Layer w20: RB_P3.2 DB_P3.1
NetF1_P1_3: F1_P1.3 F1_P1.4
  other v3: 7600,2900
NetF1_P2_3: F1_P2.3 F1_P2.4
  other v3: 7600,4300
NetF1_P3_3: F1_P3.3 F1_P3.4
  other v3: 7600,5700
NetL3V3_1: L3V3.1 R7.1 | length 75
  Top Layer w6: L3V3.1 R7.1
NetQH_P1_2: QH_P1.2 RH_P1.2 | length 95.5
  Top Layer w20: RH_P1.2 QH_P1.2
NetQH_P2_2: QH_P2.2 RH_P2.2 | length 95.5
  Top Layer w20: RH_P2.2 QH_P2.2
NetQH_P3_2: QH_P3.2 RH_P3.2 | length 95.5
  Top Layer w20: RH_P3.2 QH_P3.2
NetQL_P1_2: QL_P1.2 RL1_P1.2 | length 95.5
  Top Layer w20: RL1_P1.2 QL_P1.2
NetQL_P2_2: QL_P2.2 RL1_P2.2 | length 95.5
  Top Layer w20: RL1_P2.2 QL_P2.2
NetQL_P3_2: QL_P3.2 RL1_P3.2 | length 95.5
  Top Layer w20: RL1_P3.2 QL_P3.2
NetRV1_P1_1: RV1_P1.1 RV2_P1.2 U2_P1.3 | length 415.6
  Top Layer w6: U2_P1.3 6575,3125 6625,3075 RV2_P1.2 6775,3075 6850,3000 RV1_P1.1 RV1_P1.1@6850,2925
NetRV1_P2_1: RV1_P2.1 RV2_P2.2 U2_P2.3 | length 411
  Top Layer w6: U2_P2.3 6575,4525 6625,4475 RV2_P2.2 6775,4475 6850,4400 RV1_P2.1
NetRV1_P3_1: RV1_P3.1 RV2_P3.2 U2_P3.3 | length 411
  Top Layer w6: U2_P3.3 6575,5925 6625,5875 RV2_P3.2 6775,5875 6850,5800 RV1_P3.1
NRST: B1.2 B1.3 C7.2 R12.2 U2.7
PB3: R13.2 U2.55
PF6: C9.2 U2.47
TCK: R9.2 U2.49
THROTTLE: U2.22
TMS: R11.2 U2.46
USART_RX: U2.43 USART.1
USART_TX: U2.58 USART.2
V_SENSE1: U2.14 U2_P1.1 U2_P1.2 | length 1035.1
  Top Layer w6: v1(5750,2905) 6320,2905 6475,3060 U2_P1.1 U2_P1.2
  Bottom Layer w6: 5635,2910 5640,2905 v1(5750,2905)
V_SENSE2: U2.15 U2_P2.1 U2_P2.2 | length 925.9
  Top Layer w6: v1(5740,4310) 6325,4310 6475,4460 U2_P2.1 U2_P2.2
V_SENSE3: U2.16 U2_P3.1 U2_P3.2 | length 1030.9
  Top Layer w6: v1(5740,5710) 6325,5710 6475,5860 U2_P3.1 U2_P3.2
  Bottom Layer w6: 5635,5710 v1(5740,5710)
VDD: C8.2 C14.2 C15.2 CU2_1_P1.1 CU2_1_P2.1 CU2_1_P3.1 CU2_2_P1.1 CU2_2_P2.1 CU2_2_P3.1 L1.1 R4.2 R6.1 R8.2 U2.1 U2.32 U2.64 U2_P1.8 U2_P2.8 U2_P3.8 | length 9634.6
  Top Layer w20: R4.2 4724.76,3355.24 ; L1.1 4604.53,2721.06 4600,2716.54 4600,2150.59 4671.06,2079.53 R6.1 4675.98,2078.54 4749.02,2078.54 C14.2 C15.2 4867.91,2120.47 R8.2 5600,2120.47 5665,2185.47 ; C8.2 4782.56,3297.44 4724.76,3355.24 ; 5612.5,2782.5 5655,2825 v1(5655,2950) 5655,3445 ; v1(5740,4350) 6325,4350 6400,4425 CU2_1_P2.1 CU2_2_P2.1 6472.2,4775 6475,4772.2 U2_P2.8 ; v1@5755,2950 6325,2950 6400,3025 CU2_1_P1.1 CU2_2_P1.1 6472.2,3375 6475,3372.2 U2_P1.8 ; U2_P3.8 6475,6172.2 6472.2,6175 CU2_2_P3.1 CU2_1_P3.1 6400,5825 6325,5750 5725,5750 5655,5680 v1(5655,4350) 5655,3445 ; 4724.76,3355.24 4742.67,3373.14 ; 4742.67,3373.14 4787.28,3417.76 ; 4742.67,3373.14 4787.28,3417.76 ; 4787.28,3417.76 4814.53,3445 5655,3445
  Bottom Layer w20: v1(5655,2950) 5655.12,2950.12 v1(5750.77,2950.12) ; v1(5655,4350) v1(5740,4350)
pads on no net: U2.3 U2.4 U2.5 U2.6 U2.8 U2.9 U2.10 U2.11 U2.17 U2.18 U2.19 U2.20 U2.21 U2.24 U2.25 U2.26 U2.27 U2.28 U2.29 U2.38 U2.39 U2.40 U2.44 U2.45 U2.48 U2.50 U2.51 U2.52 U2.53 U2.54 U2.56 U2.57 U2.59 U2.61 U2.62 U2_P1.5 U2_P1.6 U2_P1.7 U2_P2.5 U2_P2.6 U2_P2.7 U2_P3.5 U2_P3.6 U2_P3.7
copper on no net:
  other v2: 6130,3525 6130,3625

## Polygon pours and split planes (outlines as drawn)
no net on Top Layer "Top Layer-No Net" (solid, pour order 4): 2075,3675
no net on Top Layer "Top Layer-No Net 1" (solid, pour order 2): 2260,3750

## Other copper
Top Layer:
  region net +120: 6999.99,4870 7250,4870 7250,5075 7085,5240 6999.99,5240
  region net NetF1_P1_3: 7280,2560 7280,2880 7500,3100 7800,3100 7800,2520 7320,2520
  region net NetF1_P2_3: 7280,3960 7280,4280 7500,4500 7800,4500 7800,3920 7320,3920
  region net NetF1_P3_3: 7280,5360 7280,5680 7500,5900 7800,5900 7800,5320 7320,5320
  region net +120: 7250,2070 7250,1050 5625,1050 5625,1625 6725,1625 6725,2070
  region net +120: 7250,4870 7000,4870 7000,2070 7250,2070
  region net +120: 6380,2360 6460,2440 7000,2440 7000,2070 6380,2070
  region net NetCB_P1_1: 6640,2770 6935,2770 6970,2735 6970,2550 6940,2520 6640,2520
  region net GND: 6220,2280 6130,2280 6100,2250 6100,2100 6130,2070 6220,2070
  region net GND: 6510,2845 6510,3005 6670,3005 6735,2940 6735,2845
  region net NetCB_P1_1: 6510,2520 6510,2605 6490,2625 6460,2625 6460,2770 6640,2770 6640,2520
  region net NetCB_P2_1: 6640,4170 6935,4170 6970,4135 6970,3950 6940,3920 6640,3920
  region net GND: 6510,4245 6510,4405 6670,4405 6735,4340 6735,4245
  region net NetCB_P2_1: 6510,3920 6510,4005 6490,4025 6460,4025 6460,4170 6640,4170 6640,3920
  region net +120: 6380,3760 6460,3840 7000,3840 7000,3470 6380,3470
  region net GND: 6220,3680 6130,3680 6100,3650 6100,3500 6130,3470 6220,3470
  region net NetCB_P3_1: 6640,5570 6935,5570 6970,5535 6970,5350 6940,5320 6640,5320
  region net NetCB_P3_1: 6510,5320 6510,5405 6490,5425 6460,5425 6460,5570 6640,5570 6640,5320
  region net +120: 6380,5160 6460,5240 6999.99,5240 6999.99,4870 6380,4870
  region net GND: 6510,5645 6510,5805 6670,5805 6735,5740 6735,5645
  region net GND: 6220,5080 6130,5080 6100,5050 6100,4900 6130,4870 6220,4870
  region: 6220,5080
  region: 6220,5080

## Silkscreen, mask and mechanical layers (free items; w line width, h text height)
Top Overlay:
  lines w10: 7275,2775 7275,2875 7500,3100 7800,3100 7800,2525 7450,2525 ; 7275,4175 7275,4275 7500,4500 7800,4500 7800,3925 7450,3925 ; 7275,5575 7275,5675 7500,5900 7800,5900 7800,5325 7625,5325 7450,5325 ; 6800,1050 7025,1050 7250,1050 7250,2300 6800,2300 6800,1050
  text "PHASE W" at 7400,5925 h60
  text "PHASE V" at 7375,4525 h60
  text "PHASE U" at 7400,3125 h60
  text "PB3" at 4690,2340 h30 r90
  text "NRST" at 4795,2340 h30 r90
  text "TMS" at 4890,2340 h30 r90
  text "GND" at 4995,2340 h30 r90
  text "TCK" at 5090,2340 h30 r90
  text "VDD" at 5190,2340 h30 r90
  text "USART_TX" at 5285,2340 h30 r90
  text "USART_RX" at 5395,2340 h30 r90
  text "+VBatt" at 6850,2325 h60

## Text inside footprints (layer, text, board x,y; h text height)
C1: Top Overlay "+" at 5178.43,1665 h30
C4: Top Overlay "+" at 5185,1940 h30
C5: Top Overlay "+" at 5780,1430 h30 r90
C6: Top Overlay "+" at 6455,1430 h30 r90